# Altium PCB PCBA-2121-01.PcbDoc (part 2 of 2)
Units mil, origin at the board's own origin, x right, y up, seen from the top; angles counter-clockwise.
Board outline 748.03 x 2362.2 mil, 4 copper layers (L1, L2, L3, L4), stack 62.192 mil thick; 81 components, 54 nets, 289 pads, 212 vias.
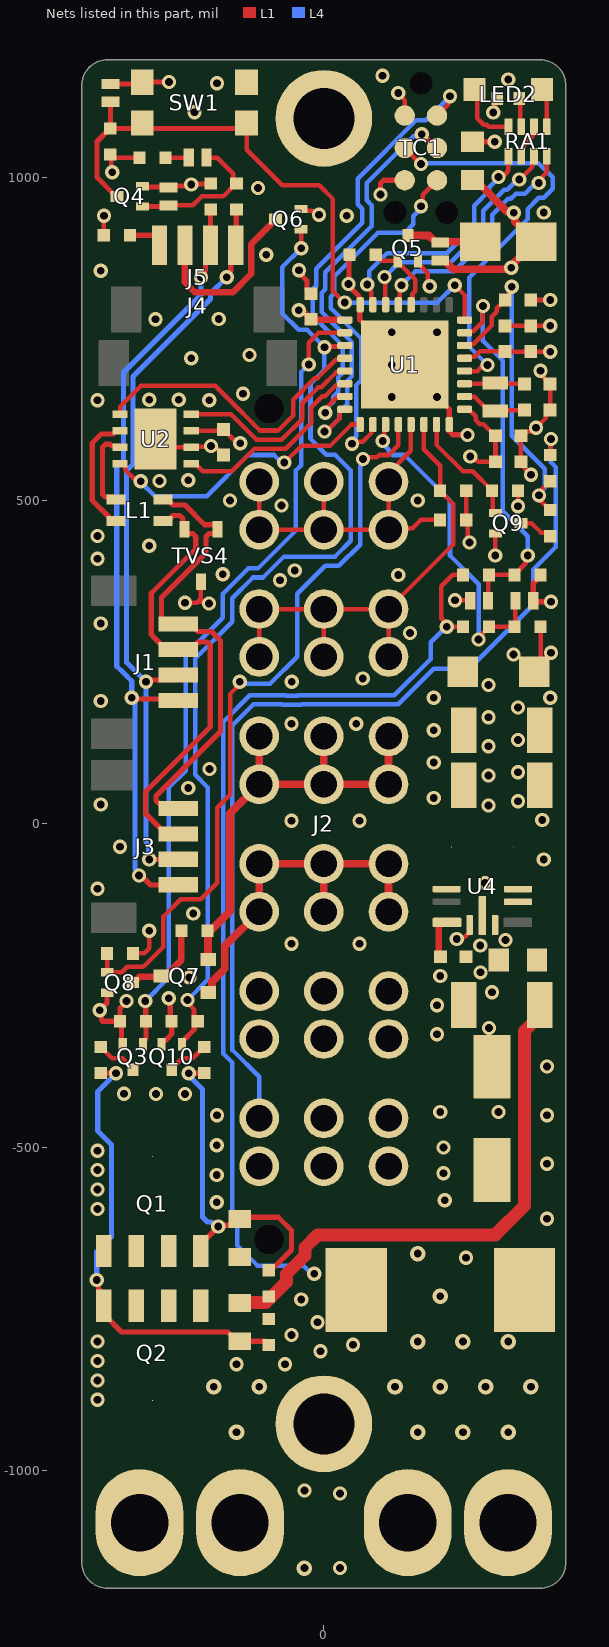
[diagram p4: the nets of this part, all layers, seen from the top]

## Via types
v1: diameter 22, hole 12, L1 to L4, tented both sides, 196 vias
v2: diameter 24, hole 12, L1 to L4, tented both sides, 16 vias

## Nets (pads, with @x,y where several pads share a name; then routed paths per layer and width w, separated by ;. In a path a pad name is that pad's centre, name@x,y a point inside that pad or via, vN(x,y) a via of type N, cw(c..) or ccw(c..) an arc to the next point about the centre after c; other vN are vias at no path point)
3V3: C1.1 C4.2 C5.2 C8.2 C9.2 C10.2 C11.2 C12.1 C15.2 D2.C LED2.2 R3.1 R8.2 R9.2 R15.2 R19.1 R20.1 SPK1.1 TC1.1 TVS3.C U1.1 U1.5 U1.17 U2.3 U4.4 U4.9 | length 1105
  L1 w7: R3.1@-340.18,910 -340.09,910.09 -340.09,939.91 v1(-340,940) ; R9.2@-330,1034.82 -328.49,1033.32 -328.49,1009.04 v1(-326.99,1007.53) ; R9.2@-328.37,1033.19 -325.18,1030 R8.2@-290.18,1030 ; U2.3@-204.88,607.8 -161.89,607.8 C5.2@-160,609.69 ; C5.2@-155,609.69 -136.7,591.38 -132.08,591.38 v1(-129.21,588.51) ; v1(115,1130) 115,1128.97 125,1118.97 TC1.1@125,1095 ; v1(205.35,-177.73) 208.22,-174.86 217.39,-174.86 225.32,-166.93 U4.9@225.32,-156.1 ; U1.5@217.52,719.84 219.73,722.05 233.04,722.05 241.99,731 279.32,731 C11.2@280,730.31 280.16,730.16 349.84,730.16 v1(350,730) ; R20.1@220.18,515 220.18,475 226.03,469.15 223.09,469.15 222.59,468.65 222.59,437.41 v1(225,435) ; U1.1@223.62,641.1 234.58,630.14 234.58,624.39 240.97,618 246.72,618 258.38,606.34 258.97,606.34 264.72,600.59 C9.2@264.72,600 ; v1(226.16,568.19) 230.22,568.19 238.41,560 C12.1@260.32,560 ; v1(261.99,1099.85) 264.86,1102.72 264.86,1117.81 LED2.2@268.27,1121.22 ; C12.1@265.32,560 C9.2@265.31,600 ; v1(293.07,262.05) v1@293.07,266.11 ; TVS3.C@325.12,235 335.18,245.06 R15.2@335.18,305
  L1 w10: v1(-38.7,794.17) -36.4,791.87 -31.56,791.87 -21.78,782.1 -21.78,778.9 -21.07,779.61 31.77,779.61 U1.17@32.48,778.9
  L1 w12: D2.C@187.78,869.35 199.65,857.47 284.77,857.47 288.01,860.72 288.01,861.67 SPK1.1@326.34,900 ; C1.1@230,995.47 239.75,985.72 243.99,985.72 282.97,946.75 291.69,946.75 295.51,942.92 295.51,930.82 SPK1.1@326.34,900 ; SPK1.1@328.31,900 SPK1.1@326.34,900
  other v1: 340,-55 337.7,6.19 300,35 300,80 300,130 300,180 350,195 351.02,264.68 289.84,859.84 293.6,944.84 340,945
CAN_B_N: L1.1 U2.6 | length 190.6
  L1 w8: L1.1@-321.42,468.27 -328.31,468.27 -332.18,472.14 -332.18,474.3 -358.02,500.14 -358.02,588.94 -343.96,603 -325.82,603 -321.02,607.8 U2.6@-315.12,607.8
CAN_B_P: L1.2 U2.7 | length 127
  L1 w8: L1.2@-321.42,501.73 -325.29,505.61 -337.33,505.61 -342.02,510.29 -342.02,582.31 -337.33,587 -330.7,587 -327.81,584.11 -317.02,584.11 U2.7@-315.12,582.2
CAN_N: J1.3 J3.3 L1.4 TVS4.2 | length 730.9
  L1 w8: L1.4@-248.58,468.27 -241.69,468.27 -237.82,472.14 -237.82,472.31 -233.13,477 -222.61,477 -217.93,472.31 -217.93,457.69 TVS4.2@-215.59,455.35 -215.59,452.84 -211.72,448.96 -202.69,448.96 -198,444.28 -198,425.5 -266.81,356.69 -266.81,292.69 -264.24,290.12 -264.24,289.93 -244,269.69 -206.59,269.69 -194.91,281.37 -180.19,281.37 -175.5,276.68 -175.5,149.83 -275.52,49.81 -275.52,16.21 -244,-15.31 J3.3@-225.3,-15.31
CAN_P: J1.4 J3.4 L1.3 TVS4.1 | length 723.2
  L1 w8: L1.3@-244.71,505.61 L1.3@-248.58,501.73 -241.69,501.73 -237.82,497.86 -237.82,497.69 -233.13,493 -214.79,493 -184.28,462.49 -168.28,462.49 -164.41,458.62 TVS4.1@-164.41,455.35 -164.41,452.84 -168.28,448.96 -177.31,448.96 -182,444.28 -182,418.87 -250.81,350.06 -250.81,316.87 -243,309.06 -206.59,309.06 -194.91,297.37 -173.56,297.37 -159.5,283.31 -159.5,143.2 -259.52,43.18 -259.52,36.55 -254.84,31.87 -233.11,31.87 J3.4@-225.3,24.06
CAN_RX: U1.21 U2.4 | length 312
  L1 w7: U2.4@-204.88,633.39 -143.57,633.39 -124.19,614 -124.19,613.89 -104.5,594.2 -64.79,594.2 -33.48,625.51 -33.48,650.22 -8.36,675.34 -3.9,675.34 18.71,697.95 30.27,697.95 U1.21@32.48,700.16
CAN_TX: U1.22 U2.1 | length 312.8
  L1 w7: U2.1@-204.88,556.61 -198.98,556.61 -187.33,544.97 -142.44,544.97 -120.4,567.01 -120.31,567.01 -107.12,580.2 -59,580.2 -19.48,619.71 -19.48,644.42 -2.56,661.34 1.9,661.34 18.82,678.26 30.27,678.26 U1.22@32.48,680.47
CHG_EN: Q3.G R6.2 U1.18 | length 1262.1
  L1 w7: v1(-23.46,710.3) -23.46,743.99 -8.24,759.21 U1.18@32.48,759.21
  L1 w8: Q3.G@-279.25,-340.32 -279.25,-336.77 -274.82,-332.34 R6.2@-274.82,-305 -275.34,-304.48 -275.34,-274.22 v1(-275.86,-273.7)
  L4 w7: v1(-275.86,-273.7) -240,-237.84 -240,55.8 -213.56,82.24 -213.56,261.44 -156.21,318.79 -156.21,355.57 -116.77,395 -101.84,395 -43.08,453.76 -43.08,546.5 -34.95,554.64 -34.95,698.7 -23.46,710.19 v1(-23.46,710.3)
DSG_EN: Q6.G Q10.G R23.2 U1.19 | length 1565.3
  L1 w7: v1(-210.72,-272) -210.72,-276.06 -200.67,-286.11 -200.67,-309.85 R23.2@-200.17,-310.35 ; v1(-35,890) Q6.G@-35,915
  L1 w8: Q10.G@-219.25,-340.32 -219.25,-336.77 -200.17,-317.69 R23.2@-200.17,-310.35 ; v1(0.98,737.04) 2.22,738.29 31.24,738.29 U1.19@32.48,739.53
  L4 w7: v1(-210.72,-272) -179.71,-240.99 -179.71,56.89 -198.71,75.89 -198.71,255.79 -141.71,312.79 -141.71,348.85 -109.56,381 -94,381 -61.59,413.41 17.28,413.41 41.71,437.84 41.71,546.41 17.28,570.84 3.99,570.84 -20.6,595.43 -20.6,680.67 0.98,702.25 v1(0.98,737.04) -25.98,764 -39,764 -64.64,789.64 -64.64,860.36 v1(-35,890)
EN_N: J2.3 Q7.S | length 581.8
  L1 w12: Q7.S@-175.1,-264.07 -172.77,-261.75 -172.77,-243.64 -153.77,-224.64 -153.77,-223.96 -153.08,-223.27 -153.08,-188.51 J2.3@-100,-135.43 J2.3@-100,-61.42 J2.3@0,-61.42 ; J2.3@0,-135.43 J2.3@0,-61.42 ; J2.3@100,-135.43 J2.3@100,-61.42 J2.3@0,-61.42
EN_P: J2.4 Q7.D R7.2 | length 725.9
  L1 w12: Q7.D@-179.2,-209.41 -179.2,-168.89 -176.47,-166.16 -176.16,-166.16 -145,-135 -145,16.42 J2.4@-100,61.42 ; J2.4@-100,135.43 J2.4@-100,61.42 ; J2.4@0,135.43 J2.4@0,61.42 ; J2.4@100,135.43 J2.4@100,61.42 J2.4@0,61.42 ; J2.4@-100,61.42 J2.4@0,61.42
FAULT_RESET: Q8.G R13.1 U1.28 | length 1172
  L1 w7: R13.1@-335.18,-200 -334.93,-200.25 Q8.G@-334.93,-225.24 ; Q8.G@-334.68,-225.24 Q8.G@-334.68,-229.25 -312.53,-229.25 -304.02,-220.75 -278.8,-220.75 -247.88,-189.83 -247.88,-142.88 -221.37,-116.37 -190.43,-116.37 -165,-90.93 -165,25 -145,45 -145,200.93 -130.05,215.88 v1(-130.05,219.93) ; v1(60.51,564.3) 63.05,566.84 82.01,566.84 85.51,570.34 100.06,570.34 115.04,585.32 115.04,617.36 U1.28@115.16,617.48
  L4 w7: v1(-130.05,219.93) -127.18,217.06 -117.07,217.06 -82.93,217.06 -41.21,258.78 -41.21,355.63 2.07,398.91 23.28,398.91 56.21,431.84 56.21,552.7 57.64,554.13 57.64,561.43 v1(60.51,564.3)
GND: C1.2 C2.1 C3.1 C4.1 C5.1 C6.1 C7.1 C8.1 C9.1 C10.1 C11.1 C12.2 C13.2 C14.- C15.1 C16.1 H1.HOLE H2.HOLE H4.HOLE H5.HOLE J2.2 Q3.S Q4.S Q5.S Q6.S Q8.S Q9.S Q10.S R1.2 R6.1 R11.2 R12.1 R13.2 R21.1 R23.1 SW1.1 TC1.5 TVS1.C TVS2.A TVS3.A TVS4.3 TVS5.A TVS6.A TVS7.A U1.16 U1.32 U1.33 U2.2 U2.9 U4.10 U4.11 | length 1635.2
  L1 w7: R13.2@-294.82,-200 -277.85,-200 -270,-192.15 v1(-270,-165) ; U2.9@-260,595 -247.2,582.2 U2.2@-204.88,582.2 -203.85,583.24 -175.32,583.24 v1(-174.29,584.28) -171.42,581.41 -166.09,581.41 C5.1@-155,570.32 ; v1(-214.54,342.09) -196.12,342.09 -194.81,343.41 ; TVS4.3@-190,374.65 -190,348.22 -194.81,343.41 ; v1(-177.71,340.78) -180.34,343.41 -194.81,343.41 ; Q6.S@-35.32,950.75 -32.52,947.95 -17.83,947.95 -11.5,941.62 v1(-7.44,941.62) ; Q5.S@145.75,870.32 145.75,866.77 160.84,851.68 160.84,834.22 v1(163.71,831.35) ; v1(202.8,345.98) 225.24,345.98 TVS6.A@226.22,345 ; v1(265,415) Q9.S@265,449.25 ; C11.1@280,769.68 280.16,769.84 349.84,769.84 v1(350,770) ; C9.1@299.68,600 306.03,606.34 317.64,606.34 323.7,612.4 v1(327.76,612.4) ; v1(300.09,491.27) v1(300.09,491.27) 300.13,514.96 R1.2@300.18,515 ; C12.2@302.34,557.66 v1(320,540) ; C12.2@304.69,560 C9.1@304.68,600 ; v1@328.09,612.4 343.34,627.65 343.34,633.66 C6.1@349.68,640 C7.1@349.68,680 337.59,692.1 337.59,697.56 v1(334.72,700.43)
  L1 w8: Q8.S@-334.68,-260.75 -334.68,-262.64 -335.09,-263.05 -335.09,-276.74 -346.24,-287.9 v1(-346.44,-287.9) -343.76,-290.58 -343.76,-302.99 -341.75,-305 R6.1@-315.18,-305 ; TVS5.A@-330,1143.78 -283.43,1143.78 SW1.1@-280.71,1146.5 -280.27,1146.94 v1(-239.32,1146.94) ; Q3.S@-310.75,-340.32 -312.96,-338.1 -312.96,-307.21 R6.1@-315.18,-305 ; v1(-304.86,-273.56) -304.86,-274.4 -315.18,-284.72 R6.1@-315.18,-305 ; Q4.S@-277.58,985.81 -276.2,984.43 -240.65,984.43 TVS2.A@-240,983.78 -237.68,986.1 -207.09,986.1 v1(-204.77,988.42) -203.89,989.3 -175.88,989.3 R11.2@-175,990.18 ; Q10.S@-250.75,-340.32 -250.75,-336.77 -248.45,-334.47 -244.91,-334.47 -235.18,-324.74 R23.1@-235.18,-305 -237.39,-302.79 -237.39,-271.66 v1(-239.61,-269.45) ; v1(-38.44,856.03) -38.44,852.25 -25.84,839.64 -25.84,825.53 C8.1@-20,819.68 ; v1(38.22,834.5) 38.22,831.76 54.39,815.58 54.39,804.23 U1.16@56.1,802.52 ; v1@39.02,834 R12.1@39.02,879.72 ; U1.16@55.57,801.99 55.57,779.43 124.78,710.22 U1.33@124.78,710 ; v1(87.69,972.89) 87.69,990.31 92.37,995 TC1.5@125,995 ; v1(175,660) 193.9,641.1 U1.32@193.9,617.48 ; U1.32@193.06,607.7 199,601.76 221.48,601.76 v1(222,601.24) ; C1.2@230,1054.53 v1(264.18,1054.51) ; C13.2@315.47,809.22 316.25,810 C13.2@319.69,810 v1(350,810) ; TVS7.A@323.78,345 TVS7.A@323.78,345.17 ; R21.1@335.18,385 329.83,379.65 329.83,377.73 323.78,371.69 TVS7.A@323.78,345.17 ; v1(351.02,343.59) 325.37,343.59 TVS7.A@323.78,345.17
  other v1: 25,-1150 25,-1035 219.54,-670.27 345,-610 345,-525 345,-450 180,-445 270,-445 345,-375 175,-325 255.12,-315.43 175,-280 260,-260 -208,-237.07 180,-235 242.1,-229.33 241.84,-187.91 -50,-185 55,-185 280.6,-179.42 -201.71,-138.43 -350,-100 249,-91.28 -315,-35 -50,5 55,5 254.58,28.5 -345,30 170,40 -209.67,55.73 254.58,75 -176.71,85 170,95 254.58,120 170,145 -50,155 50,155 254.58,165 -345,190 170,195 254.58,215 -49.54,220.04 60,225 133.12,295.25 -345,310 -67.72,376.88 115,385 -156.09,386.09 -45,391.91 -350,410 -270,430 -350,445 -65.27,492.42 -145,500 145,500 -254,530.25 -209.63,531.15 -350,655 -176.94,655.12 -269.72,655.79 -224.35,655.58 105,660 -125.03,664.99 105,710 -205,720 -115,725 105,760 175,760 -260,780 -162.54,780.57 -345,855 -89.13,879.84 35.56,940 -101.89,982.92 -200,1100 -165,1145 285,1150.75 90.71,1156.42
  other v2: 145,-940 215,-940 285,-940 110,-870 180,-870 250,-870 320,-870 145,-800 215,-800 285,-800 180,-730 145,-664
LED_B: RA1.5 U1.15 | length 381.3
  L1 w7: v1(67.22,833.87) 67.22,829.82 73.58,823.45 73.58,804.77 U1.15@75.79,802.56 ; v1(270.11,999.96) 272.98,1002.83 278.62,1002.83 285.24,1009.45 285.24,1032.13 RA1.5@285.47,1032.36
  L4 w7: v1(67.22,833.87) 70.09,836.74 70.09,854.71 97.68,882.3 190.21,882.3 232.22,924.31 232.22,955.75 255.59,979.12 255.59,984.07 270.11,998.59 v1(270.11,999.96)
LED_G: RA1.8 U1.13 | length 373.7
  L1 w7: U1.13@115.16,802.52 117.37,804.73 117.37,830.06 v1(119.91,832.6) ; v1(332.14,990.65) 332.14,994.71 344.53,1007.1 RA1.8@344.53,1032.36
  L4 w7: v1(119.91,832.6) 141.61,854.3 193.22,854.3 201.8,854.3 260.22,912.72 260.22,921.3 260.22,941.86 284.7,966.34 289.06,966.34 296.99,974.27 310.87,974.27 321.5,984.89 322.32,984.89 328.08,990.65 v1(332.14,990.65)
LED_R: RA1.7 U1.14 | length 377.2
  L1 w7: v1(93.85,845.34) 94.66,844.53 94.66,803.58 U1.14@95.7,802.54 ; v1(302.19,996) 302.34,996 322.44,1016.09 322.44,1029.96 RA1.7@324.84,1032.36
  L4 w7: v1(93.85,845.34) 116.82,868.3 187.42,868.3 196,868.3 246.22,918.51 246.22,927.1 246.22,947.66 278.9,980.34 283.26,980.34 298.92,996 v1(302.19,996)
LED_SW: J4.3 J5.3 Q6.D | length 266.5
  L1 w10: J4.3@-214.68,889.49 -214.68,837.16 -199.53,822 -140.47,822 -112.13,850.34 -112.13,896.41 Q6.D@-78.54,930
NetC6_2: C6.2 U1.2 Y1.1 | length 102.8
  L1 w7: U1.2@217.52,660.79 218.27,660.04 233.47,660.04 255.16,638.35 Y1.1@265,638.35 265.83,639.17 309.49,639.17 C6.2@310.31,640
NetC7_2: C7.2 U1.3 Y1.2 | length 93
  L1 w7: U1.3@217.52,680.47 217.76,680.24 310.08,680.24 C7.2@310.31,680
NetC16_2: C16.2 U4.8 | length 65.2
  L1 w10: C16.2@180.31,-205 177.76,-202.44 177.76,-154.45 180.04,-152.17 U4.8@190.37,-152.17
NetD1_A: D1.A Q2.G R2.2 R4.2 | length 707.9
  L1 w8: v1(-351.02,-705) -348.34,-707.68 -348.34,-718.55 -335,-731.89 Q2.G@-335,-744.88 ; R4.2@-345,-385.18 v1(-321.27,-385.18) ; Q2.G@-340,-744.88 -340,-757.87 -312.87,-785 -148.4,-785 -143.72,-789.69 -143.72,-789.75 -133.94,-799.53 D1.A@-130,-799.53 -91.14,-799.53 -85.49,-805.18 R2.2@-85,-805.18
  L4 w8: v1(-351.02,-705) -351.02,-661.02 -328,-638 -328,-495.89 -349.55,-474.34 -349.55,-413.46 v1(-321.27,-385.18)
NetD2_A: D2.A Q5.D SPK1.2 | length 116.7
  L1 w12: Q5.D@130,909.68 162.28,909.68 171.32,900.65 178.13,900.65 D2.A@180,898.78 181.22,900 SPK1.2@241.69,900
NetD3_A: D3.A Q1.G R5.2 R22.2 | length 541.1
  L1 w8: v1(-208.73,-385.18) R22.2@-185,-385.18 ; Q1.G@-190,-660 -190,-647.01 -181.99,-639 -179.8,-639 -161.05,-620.25 -143.72,-620.25 -131.17,-607.7 -70.39,-607.7 -50.22,-627.87 -50.22,-658.37 -76.32,-684.47 -79.65,-684.47 R5.2@-85,-689.82
  L4 w8: v1(-208.73,-385.18) -208.73,-388.97 -187.61,-410.09 -187.61,-607.39 -180,-615 -174.17,-615 -166.88,-622.29 v1(-163.09,-622.29)
NetD5_A: D5.A R8.1 | length 41
  L1 w7: R8.1@-249.82,1030 D5.A@-208.78,1030
NetD5_C: D5.C Q4.G R10.2 TVS2.C | length 228.7
  L1 w7: TVS2.C@-240,956.22 -202.64,956.22 -188.86,970 -155.67,970 -135.49,990.18 R10.2@-135,990.18 -140.11,995.29 -140.11,1005.11 -165,1030 D5.C@-181.22,1030
  L1 w8: Q4.G@-280.32,954.25 -241.97,954.25 TVS2.C@-240,956.22
NetJ4_4: J4.4 J5.4 R3.2 | length 56.5
  L1 w8: R3.2@-299.82,910 -261.87,910 -254.06,902.19 J5.4@-254.06,894.7
NetLED2_1: LED2.1 RA1.4 | length 99.7
  L1 w7: LED2.1@232.83,1135 236.91,1130.93 236.91,1091.02 247.16,1080.78 252.07,1080.78 255.16,1077.68 RA1.4@285.43,1077.68
NetLED2_3: LED2.3 RA1.3 | length 45
  L1 w7: LED2.3@301.73,1121.22 303.44,1119.51 303.44,1079.35 RA1.3@305.16,1077.64
NetLED2_4: LED2.4 RA1.1 | length 60.4
  L1 w7: LED2.4@337.17,1135 344.53,1127.64 RA1.1@344.53,1077.64
NetQ3_D: Q3.D R4.1 | length 65.4
  L1 w7: R4.1@-345,-344.82 -344.51,-344.82 -327.32,-362.01 -311.1,-362.01 -295,-378.11 Q3.D@-295,-379.68
NetQ7_G: Q7.G Q8.D R7.1 | length 131.4
  L1 w10: Q8.D@-295.32,-245 -293.74,-245 -284.99,-236.25 -245.7,-236.25 -244.61,-235.16 -244.61,-234.61 -220.18,-210.18 R7.1@-220.18,-168.65
NetQ9_D: Q9.D R18.1 | length 52.1
  L1 w7: Q9.D@304.68,465 321.03,465 335.58,450.45 343.66,450.45 343.66,444.9 R18.1@344.75,443.8
NetQ10_D: Q10.D R22.1 | length 65.4
  L1 w7: Q10.D@-235,-379.68 -235,-378.11 -218.9,-362.01 -202.68,-362.01 -185.49,-344.82 R22.1@-185,-344.82
NetRA1_2: RA1.2 RA1.6 | length 51.8
  L1 w7: RA1.6@305.16,1032.36 306.73,1041.66 307.56,1044.19 308.97,1048.45 cw(c318.94,1045.16) 315.19,1054.97 ccw(c312.67,1061.49) 317.59,1056.52 318.49,1057.42 ; 318.51,1057.44 ccw(c311.06,1064.84) 319.68,1058.84 320.4,1059.88 ccw(c300.09,1074.02) 322.44,1063.38 ccw(c300.09,1074.02) 324.18,1068.34 324.84,1074.02 RA1.2@324.84,1077.64
NetU4_5: U4.5 U4.6
NRST: TC1.3 U1.4 | length 637.5
  L1 w7: TC1.3@125,1045 v1(150,1020) ; U1.4@227.52,700.16 237.49,700.16 243.96,706.63 249.98,706.63 v1(252.85,709.5)
  L4 w7: v1(150,1020) 151.46,1021.46 331.74,1021.46 353.64,999.56 353.64,981.75 339.72,967.83 332.42,967.83 315.1,950.51 315.1,935.1 224.4,844.4 224.4,737.95 v1(252.85,709.5)
PB_BUF: Q4.D R9.1 SW1.2 TVS5.C U1.8 | length 998.6
  L1 w7: SW1.2@-119.29,1083.5 -119.29,1042.43 -64.05,987.19 -7.19,987.19 14.06,965.94 14.06,823.2 31.17,806.09 v1(32.39,806.09) ; v1(202.32,832.81) 217.52,817.6 U1.8@217.52,778.9
  L1 w8: TVS5.C@-330,1116.22 R9.1@-330,1075.18 ; Q4.D@-325.53,974.27 -321.26,970 Q4.D@-319.68,970 ; Q4.D@-325.53,974.29 -350.84,999.6 -350.84,1054.83 -330.49,1075.18 R9.1@-330,1075.18 ; SW1.2@-119.29,1083.5 -127.62,1075.18 R9.1@-330,1075.18
  L4 w7: v1(32.39,806.09) 32.45,806.03 175.52,806.03 v1(202.32,832.81)
PB_EXT: J1.2 J3.2 J4.1 J5.1 R10.1 | length 1179.4
  L1 w8: v1(-275,220) -272.32,222.68 -232.93,222.68 J1.2@-225.3,230.32 ; v1(-269.99,-54.98) -269.84,-54.83 -225.44,-54.83 J3.2@-225.3,-54.68 ; v1(-150,845) -150,848.79 -143.76,855.03 -143.76,886.89 J5.1@-135.94,894.7 ; J5.1@-135.94,903.81 -135.47,904.29 -135.47,949.35 R10.1@-135,949.82
  L4 w8: v1(-269.99,-54.98) -271,-53.98 -271,-31.98 -275,-27.98 v1(-275,220) -305,250 -305,545.87 -294.86,556 -294.86,691.49 -175,811.36 -175,820 v1(-150,845)
PB_EXT_RTN: J1.1 J3.1 J4.2 J5.2 R11.1 | length 1244
  L1 w8: v1(-297,195) -294.97,192.97 -227.32,192.97 J1.1@-225.3,190.94 ; v1(-285.56,-79.44) -282.42,-79.44 -267.81,-94.06 J3.1@-225.3,-94.06 ; v1(-190,845) -190,848.79 -183.13,855.66 -183.13,886.89 J5.2@-177.92,892.1 ; J4.2@-175.32,889.49 -175.16,889.65 -175.16,949.67 R11.1@-175,949.82
  L4 w8: v1(-297,195) -297,220.79 -309.86,233.65 -320,243.79 -320,552.08 -309.86,562.22 -309.86,697.71 -190,817.57 v1(-190,845) ; v1@-295,195 -295,191.21 -292,188.21 -292,-69.21 -285.56,-75.66 v1(-285.56,-79.44)
SCL: J2.6 R19.2 U1.29 | length 623.7
  L1 w7: J2.6@-100,529.13 J2.6@-100,455.12 ; J2.6@-90.51,445.63 J2.6@-100,455.12 ; J2.6@0,529.13 J2.6@0,455.12 ; U1.29@134.49,617.12 134.49,576.82 100,542.33 J2.6@100,455.12 ; R19.2@179.82,470 149.84,470 137.11,457.27 102.15,457.27 J2.6@100,455.12 ; J2.6@-100,455.12 J2.6@0,455.12 ; J2.6@0,455.12 J2.6@100,455.12
SDA: J2.5 R20.2 U1.30 | length 767.2
  L1 w7: J2.5@-100,258.27 J2.5@-100,332.28 J2.5@0,332.28 ; J2.5@0,258.27 J2.5@0,332.28 ; J2.5@100,258.27 J2.5@100,332.28 ; U1.30@154.53,617.48 154.53,579.01 179.82,553.71 R20.2@179.82,515 179.82,514.51 199.67,494.66 199.67,431.96 J2.5@100,332.28 ; J2.5@0,332.28 J2.5@100,332.28
SHDN: U1.20 U2.5 | length 461.9
  L1 w7: U2.5@-315.12,633.39 -315,633.5 -315,645 -282.71,677.29 -167.74,677.29 -137.83,647.39 -137.78,647.39 -110.19,619.8 -110.19,619.69 -98.7,608.2 -70.59,608.2 -47.48,631.31 -47.48,656.01 -14.16,689.34 -9.7,689.34 18.59,717.63 30.27,717.63 U1.20@32.48,719.84
SNS_EN: Q9.G R1.1 U1.31 | length 188.9
  L1 w7: U1.31@174.21,617.48 174.21,585.79 215,545 230.31,545 259.82,515.49 259.82,514.51 260.97,513.36 260.97,483.55 263.77,480.75 Q9.G@265.32,480.75 ; Q9.G@260.96,478.55 264.72,478.55 Q9.G@265.32,477.95
SPKR: Q5.G R12.2 U1.12 | length 121.2
  L1 w7: R12.2@80.18,880 80.18,879.51 89.37,870.32 Q5.G@114.25,870.32 114.25,866.77 117.05,863.97 118.94,863.97 141.41,841.51 141.41,823.7 137.05,819.34 137.05,804.73 U1.12@134.84,802.52
STB: U1.25 U2.8 | length 452.5
  L1 w7: U2.8@-315.12,556.61 -309.21,556.61 -306.81,554.21 -306.81,547.23 -292.2,532.63 -285.87,532.63 v1(-283,529.76) ; v1(-61.29,558.7) -60.7,558.7 -34.4,585 10.27,585 42.75,617.48 U1.25@56.1,617.48
  L4 w7: v1(-283,529.76) -283,528.47 -260.95,506.42 -181.08,506.42 -117.16,570.34 -76.99,570.34 -65.35,558.7 v1(-61.29,558.7)
SWCLK: TC1.4 U1.24 | length 653.3
  L1 w7: v1(0.9,606.5) 3.41,606.5 24.26,627.35 24.26,638.99 U1.24@26.38,641.1 ; v1(151.35,1066.08) 152.64,1066.08 173.72,1045 TC1.4@175,1045
  L4 w7: v1(0.9,606.5) 3.41,606.5 24.26,627.35 24.26,637.15 36,648.89 36,684.37 43.5,691.87 43.5,744.72 2.42,785.81 2.42,785.86 -3.11,791.39 -3.11,820.8 2.42,826.32 2.42,852.56 74.06,924.21 74.06,956.11 66.19,963.98 66.19,990.86 138.54,1063.21 148.48,1063.21 v1(151.35,1066.08)
SWDIO: TC1.2 U1.23 | length 705.1
  L1 w7: v1(2.02,635.51) 4.89,638.38 4.89,644.21 19.26,658.58 31.18,658.58 U1.23@32.48,659.88 ; TC1.2@175,1095 192.2,1112.2 192.2,1122.2 v1(195,1125)
  L4 w7: v1(2.02,635.51) 2.02,639.57 14.25,651.8 14.25,660.13 22,667.88 22,690.17 29.5,697.67 29.5,738.92 -11.58,780.01 -11.58,780.07 -17.11,785.59 -17.11,826.59 -11.58,832.12 -11.58,858.36 59.38,929.32 59.38,951 52.19,958.19 52.19,997.32 142.45,1087.58 157.58,1087.58 v1(195,1125)
SWO: TC1.6 U1.26 | length 575
  L1 w7: v1(43.39,587.71) 46.26,590.58 59.9,590.58 73.58,604.26 73.58,613.06 U1.26@76.6,616.09 ; v1(150,955) 152.87,957.87 152.87,972.87 TC1.6@175,995
  L4 w7: v1(43.39,587.71) 43.39,591.77 50,598.38 50,678.57 57.5,686.07 57.5,750.52 16.42,791.61 16.42,791.66 10.89,797.19 10.89,815 16.42,820.52 16.42,846.76 83.2,913.54 124.9,913.54 138.22,926.86 138.22,939.16 150,950.94 v1(150,955)
VBAT: C14.+ J2.1 Q1.D R17.2 | length 1466.2
  L1 w7: R17.2@350,570.18 350.51,570.69 350.51,594.49 v1(351.02,595)
  L4 w7: J2.1@-100,-455.12 -100,-390.56 -141.21,-349.35 -141.21,152.5 -108.71,185 -64.7,185 -64.25,184.54 -34.84,184.54 -34.38,185 114.8,185 169.8,240 225,240 323.78,338.78 323.78,393.37 358.52,428.11 358.52,551.69 351.02,559.19 v1(351.02,595)
  other v1: -350,-595 -165.61,-584.5 186.95,-581.56 -350,-565 -165.61,-542.54 185,-540 -350,-535 -350,-505 185,-500 -165.61,-496.69 -165,-450 -214.53,-417.52 -308.73,-416.93 -259.25,-417.42
VBAT_MID: C2.2 C3.2 D1.C D3.C Q1.S Q2.S R2.1 R5.1 U4.2 U4.3 | length 836.7
  L1 w20: D1.C@-130,-740.47 -128.87,-739.34 -89.28,-739.34 -57.62,-707.68 -57.62,-695.47 -29.22,-667.07 -29.22,-654.65 -9.57,-635 265,-635 310,-590 310,-319.8 334.06,-295.75 C2.2@334.06,-280
VBAT_SNS: C13.1 R17.1 R18.2 U1.6 | length 527.2
  L1 w7: U1.6@217.52,739.53 219.73,741.74 230.85,741.74 259.66,770.54 259.66,783.88 267.4,791.62 267.4,797.09 C13.1@280.32,810 ; C13.1@286.66,816.34 286.66,822.74 290.28,826.37 v1(290.28,830.43) ; v1(332.73,507.96) v1@336.01,507.96 ; R18.2@350,485.67 R18.2@350,485.18 349.51,485.18 335.6,499.09 335.6,507.54 v1@336.01,507.96 ; R17.1@350,529.82 349.51,529.82 335.6,515.91 335.6,508.38 v1@336.01,507.96
  L4 w7: v1(290.28,830.43) 290.28,600.12 341.5,548.91 341.5,519.56 332.73,510.78 v1(332.73,507.96)
VEXT: H3.HOLE H6.HOLE Q2.D R14.2 R16.1 TVS1.A | length 1508.4
  L1 w7: R16.1@214.82,305 v1(190,305) 190,309.06 181.3,317.75 181.3,367.3 199,385 R14.2@214.82,385
  L4 w7: v1(-15,-695) -19.06,-695 -31.6,-682.46 -102.54,-682.46 -133.5,-651.5 -133.5,-617.92 -141.21,-610.21 -141.21,-369.15 -155.21,-355.15 -155.21,158.3 -114.51,199 -58.91,199 -58.45,198.54 -40.64,198.54 -40.18,199 109,199 165,255 165,280.9 189.1,305 v1(190,305)
  other v1: -30,-1030 -350,-890 -350,-860 -135,-835 -60,-835 -350,-830 -5,-815 45,-805 -350,-800 -50,-790 -10,-770 -35,-735
  other v2: -30,-1150 -135,-940 -170,-870 -100,-870
VEXT_SNS: R14.1 R21.2 TVS6.C U1.7 | length 592.6
  L1 w7: U1.7@217.52,759.21 219.73,761.42 230.74,761.42 245.66,776.34 245.66,800.44 v1(245.9,800.68) ; TVS6.C@253.78,345 254.48,345.7 254.48,384.3 R14.1@255.18,385 R21.2@294.82,385 294.82,385.49 312.13,402.8 312.13,412.13 v1(315,415)
  L4 w7: v1(245.9,800.68) 245.9,746.85 276.28,716.47 276.28,483.31 315,444.59 v1(315,415)
VREV_SNS: R15.1 R16.2 TVS7.C U1.27 | length 512.1
  L1 w7: v1(91.16,591.84) 93.32,594 93.32,614.4 U1.27@95.31,616.4 ; v1(239.19,285.23) 239.19,288.52 255.18,304.51 R16.2@255.18,305 R15.1@294.82,305 295.52,305.7 295.52,344.3 TVS7.C@296.22,345
  L4 w7: v1(91.16,591.84) 91.16,587.78 100.27,578.67 100.27,575.5 105.42,570.34 124.66,570.34 195,500 195,415 239.19,370.81 v1(239.19,285.23)
pads on no net: J1.0 J2. J3.0 J4.PAD J5.0 TC1. U1.9 U1.10 U1.11 U4.1 U4.7

## Polygon pours and split planes (outlines as drawn)
GND on L1 "NO_THERMAL" (solid, pour order 36): -319.7,669.74 -189.74,669.74 -189.74,529.76 -319.7,529.76
VBAT on L1 "NO_THERMAL" (solid, pour order 22): 150,-625 295,-625 295,-470 150,-470 150,-405 -375,-405 -375,-615 -365,-625
VBAT_MID on L1 "NO_THERMAL" (solid, pour order 0): -110,-779.61 -68,-779.61 -68,-716.17 -110,-716.17 -110,-615 -375,-615 -380,-780 -160,-780 -159.61,-779.61
NetU4_5 on L1 "NO_THERMAL" (solid, pour order 16): 215,-110 215,-95 235,-75 235,10 160,10 160,-110
VBAT_MID on L1 "NO_THERMAL" (solid, pour order 18): 295,-191.3 321.24,-165.06 321.24,-145.65 275.65,-145.65 275,-145 275,-90 282.18,-82.82 375,-82.82 375,-346.73 295,-346.73
3V3 on L1 "NO_THERMAL" (solid, pour order 33): 280,24.57 279.57,24.57 260,5 260,-80 375,-80 374.02,20 374.02,275 280,275
GND on L1 "NO_THERMAL" (solid, pour order 35): 300,-290 300,-185 325,-160 325,-115 280,-70 265,-70 265,280 175,280 155,260 155,-340 250,-340
GND on L1 "GND_L01_P034" (solid, pour order 34): -380,1185 380,1185 380,-1185 -376.1,-1185
GND on L1 "NO_THERMAL" (solid, remove dead copper, pour order 31): 300,-345 295,-340 295,-260 250,-215 -145,-215 -145,-405 0,-405 0,-1181.1 363.9,-1181.1 393.7,-1151.3 393.7,-345
VEXT on L1 "NO_THERMAL" (solid, pour order 20): -380,-1185 -376.1,-1181.1 0,-1181.1 0,-890 105,-785 105,-625 -85,-625 -85,-665 -160,-740 -160,-780 -380,-780
3V3 on L1 "NO_THERMAL" (solid, pour order 19): 275,960 275,843.69 296.76,843.69 374.02,843.69 374.02,960
GND on L4 "GND_L04_P032" (solid, pour order 32): -380,-1185 380,-1185 380,1185 -380,1185
VEXT on L4 "NO_THERMAL" (solid, pour order 30): 0,-1181.1 -376.1,-1181.1 -380,-1177.2 -380,-705 -275,-600 95,-600 95,-1135 50,-1180
GND on L4 "NO_THERMAL" (solid, pour order 26): 95,-785 95,-590.13 174.21,-510.57 172.5,-337.5 275,-235 380,-235 380,-1165 363.9,-1181.1 0,-1181.1 0,-880
VBAT on L2 "VBAT_L02_P027" (solid, pour order 27): -379.96,-320 380,-320 380,-1185 -376.1,-1185 -378.05,-1183.05
3V3 on L2 "3V3_L02_P023" (solid, pour order 23): 185,-300 380,-300 380,1160 355,1185 -350,1185 -380,1155 -380,-300
GND on L3 "GND_L03_P024" (solid, pour order 24): -380,-1185 380,-1185 380,1185 -380,1185

## Keep-outs
Keep-Out Layer:
  the board outline again, w10

## Silkscreen, mask and mechanical layers (free items; w line width, h text height)
Top Overlay:
  text "BTN" at 5.8,657.35 h35 r90
  text "COMMS   COMMS" at -147,-113 h35 r90
  text "+   -" at -139.95,-995 h60
Bottom Overlay:
  text "HEBI ROBOTICS / PCBA-2121-01 B01 / N. PAIVA - 2025-03" at 375,785 h80
Board Outline:
  the board outline again, w10